# Altium PCB PCBV1.2.PcbDoc
Units mil, origin at the board's own origin, x right, y up, seen from the top; angles counter-clockwise.
Board outline 1600 x 1600 mil, 2 copper layers (Top Layer, Bottom Layer); 61 components, 58 nets, 233 pads, 60 vias.
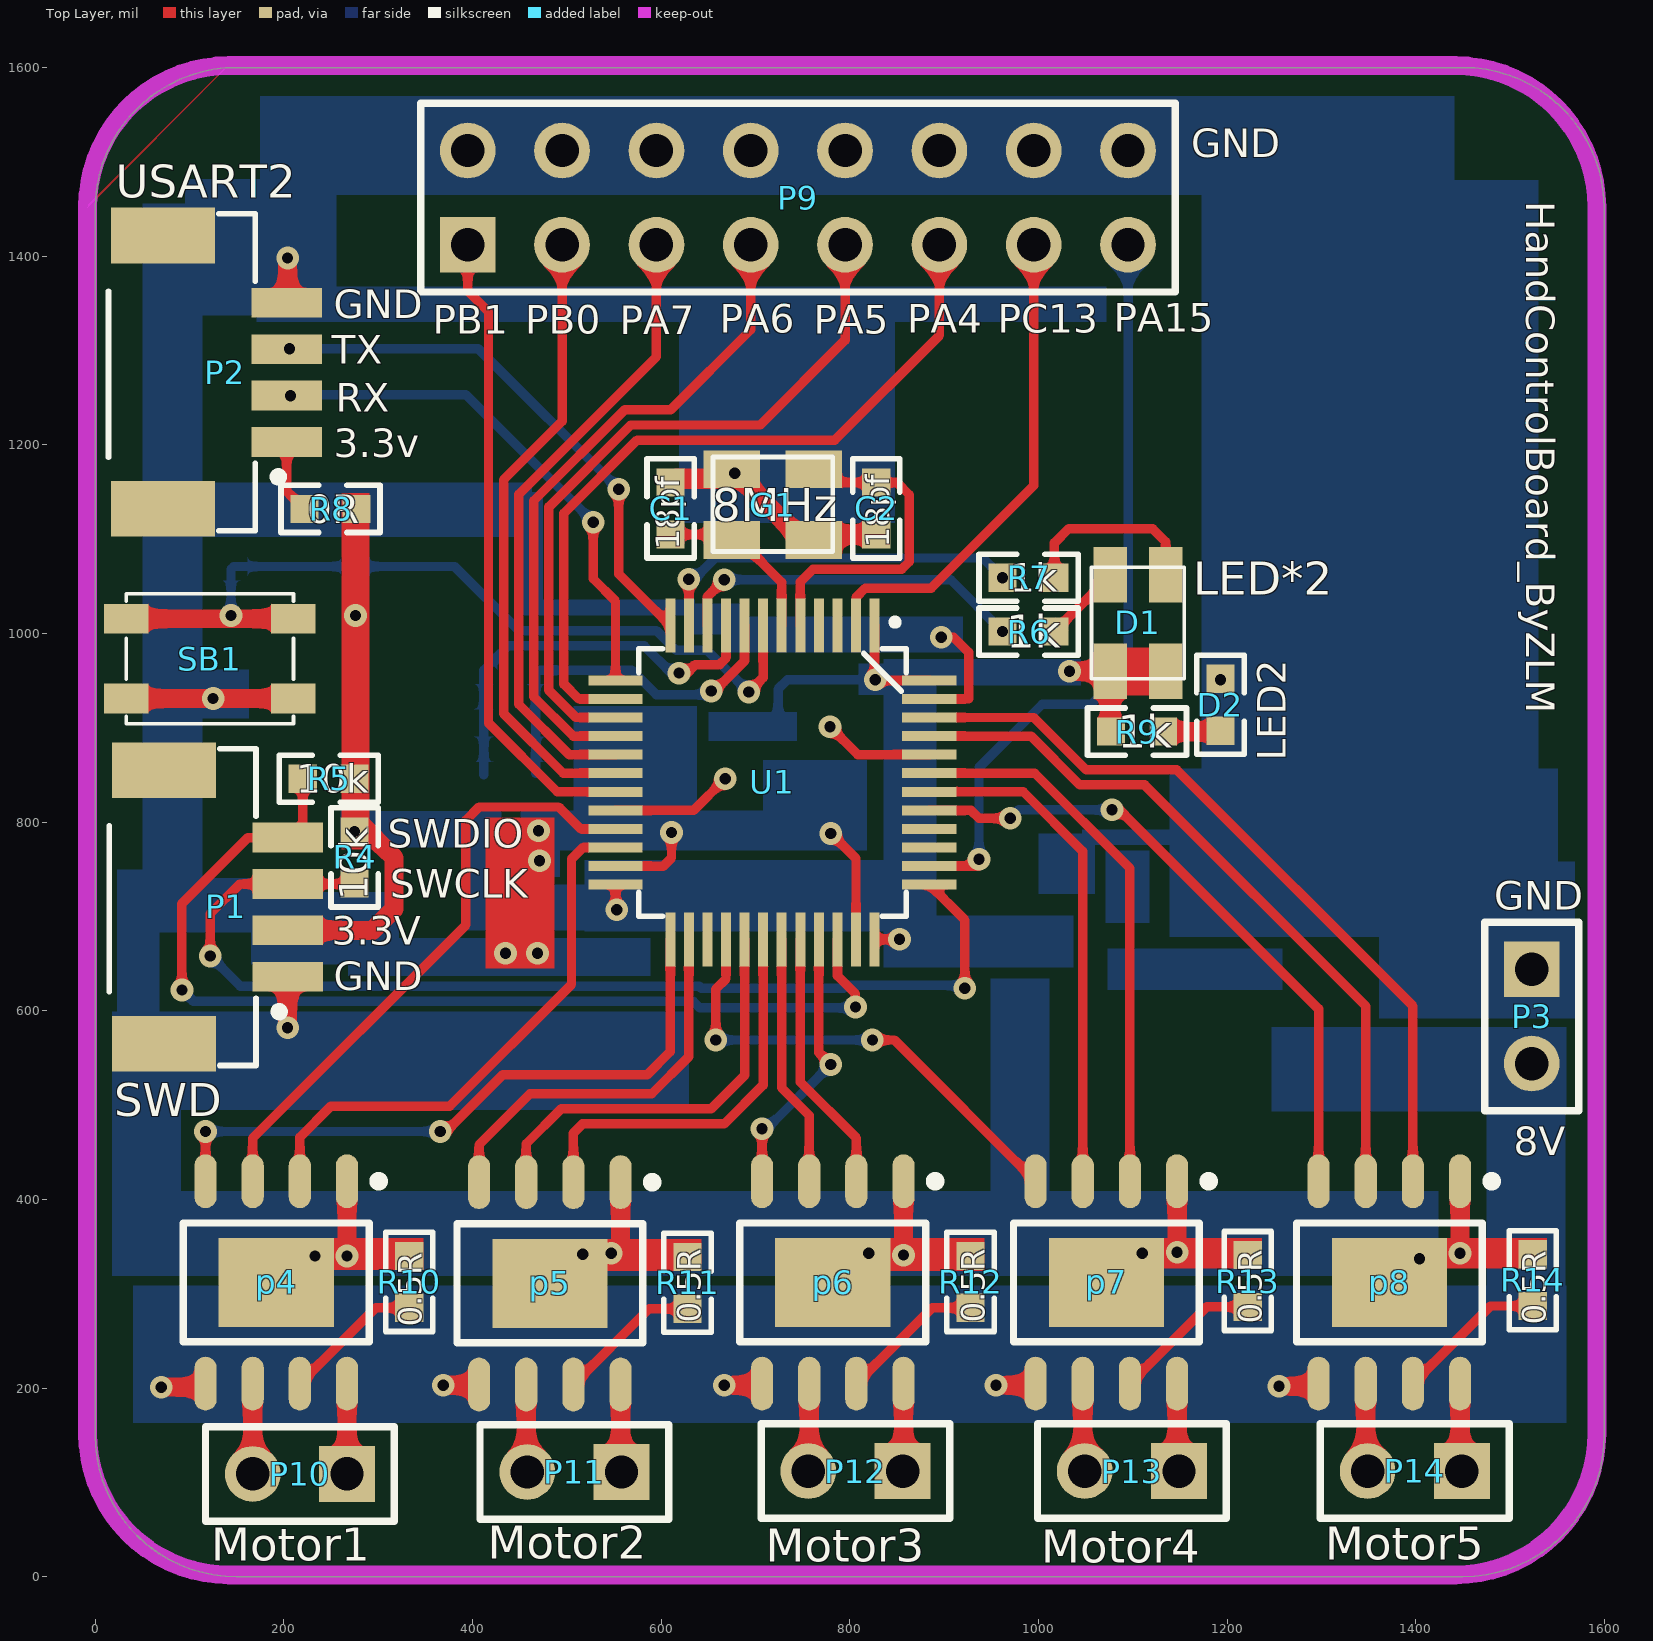
[diagram p0: Top Layer view]
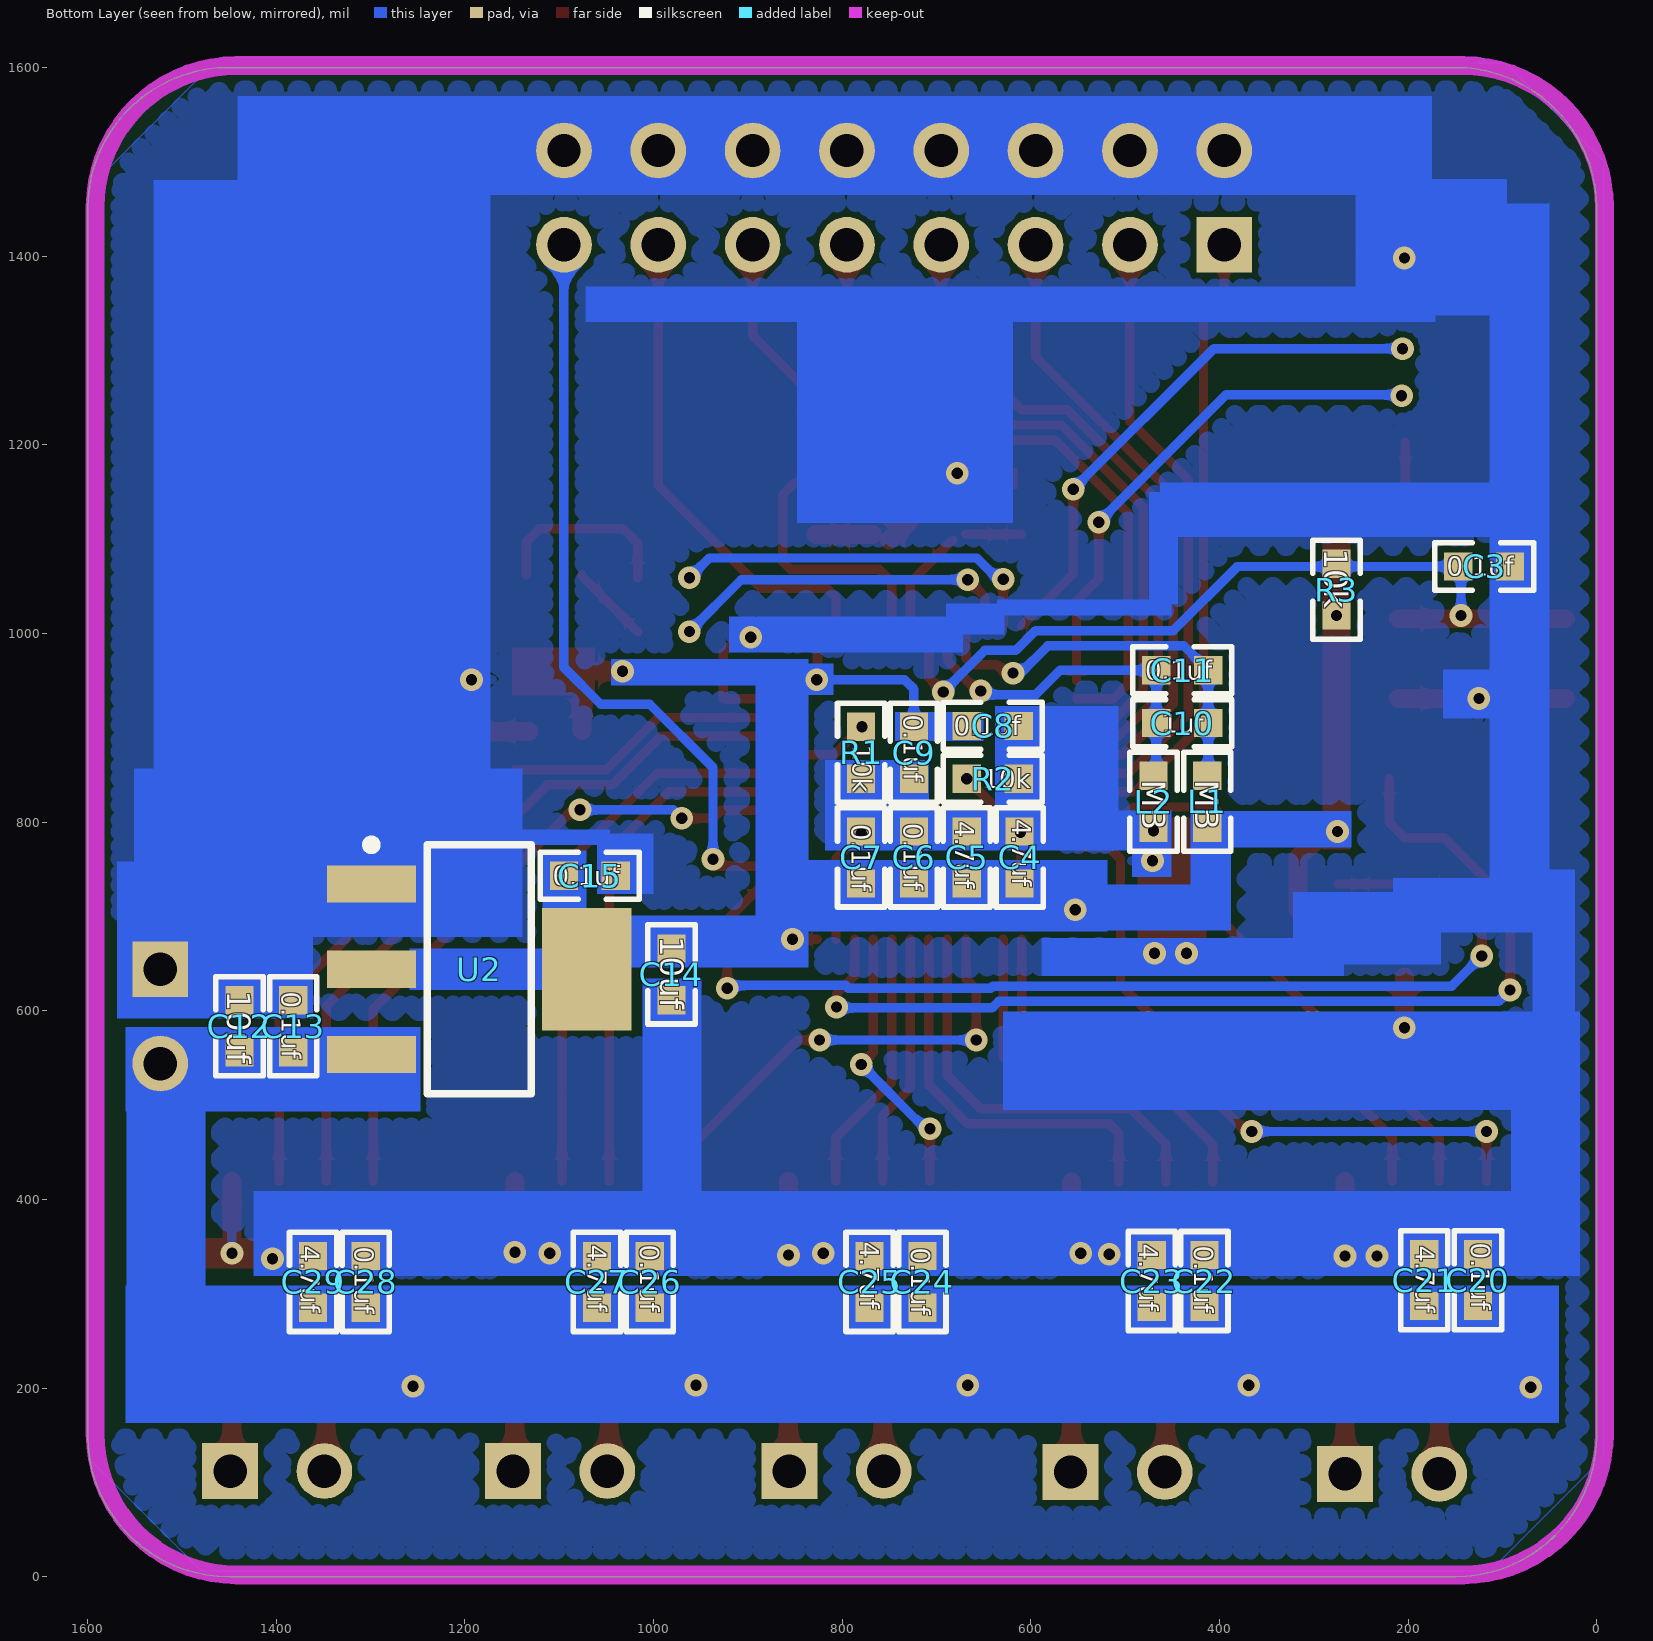
[diagram p1: Bottom Layer view, seen from below]

## Layer stack, top to bottom
Top Solder: solder mask 0.4, Solder Resist, Dk 3.5
Top Layer: signal copper 1.4
Dielectric 1: dielectric 12.6, FR-4, Dk 4.8
Bottom Layer: signal copper 1.4
Bottom Solder: solder mask 0.4, Solder Resist, Dk 3.5

## Board outline
150,0 cw(c150,150) 0,150 0,1450 cw(c150,1450) 150,1600 1450,1600 cw(c1450,1450) 1600,1450 1600,150 cw(c1450,150) 1450,0

## Design rules (kind name [scope] priority, off if disabled: settings)
Clearance [All] p1: gap=6
ComponentClearance [All] p1 off: gap=0 collisioncheckmode=3 verticalgap=10 showdistances=FALSE
MinimumSolderMaskSliver [All] p1: minsoldermaskwidth=0
PolygonConnect [All] p1: connectstyle=Relief reliefconductorwidth=10 reliefentries=4 polygonreliefangle="90 Angle" airgapwidth=10
RoomDefinition 原理图v1.2 [InComponentClass('原理图v1.2')] p1: confinementstyle=ConfineIn formatcopy=TRUE lockcomponents=FALSE outline -21,-6 1603,-6 1603,1616 -21,1616
RoutingVias [All] p1: holewidth=11.81 width=23.62 viastyle="Through Hole" minholewidth=11.81 minwidth=23.62 maxholewidth=157.48 maxwidth=157.48
SilkToBoardRegionClearance [All] p1 off:
SilkToSilkClearance [All] p1: silktosilkclearance=0
SilkToSolderMaskClearance [IsPad] p1: minsilkscreentomaskgap=0 clearancetoexposedcopper=TRUE
SolderMaskExpansion [All] p1: expansion=4
Width [All] p1: maxlimit=40 minlimit=6 preferedwidth=10
25 further rules are at their usual default settings.

## Components (designator, comment, footprint, x,y, rotation, side; value= is the part's Value field where it differs from the comment)
C1 "18pf" 0603 610,1105 r90 top
C2 "18pf" 0603 828,1160 r270 top
C3 "0.1uf" 0603 92,1071 r0 bottom
C4 "4.7uf" 0603 612,790 r270 bottom
C5 "4.7uf" 0603 668,790 r270 bottom
C6 "0.1uf" 0603 724,790 r270 bottom
C7 "0.1uf" 0603 780,790 r270 bottom
C8 "0.1uf" 0603 613,902 r0 bottom
C9 "0.1uf" 0603 724,846 r90 bottom
C10 "1uf" 0603 467,905 r180 bottom
C11 "0.1uf" 0603 467,961 r180 bottom
C12 "10uf" 0603 1439,611 r270 bottom
C13 "0.1uf" 0603 1382,611 r270 bottom
C14 "10uf" 0603 981,611 r90 bottom
C15 "0.1uf" 0603 1040,743 r0 bottom
C20 "0.1uf" 0603 126,342 r270 bottom
C21 "4.7uf" 0603 183,342 r270 bottom
C22 "0.1uf" 0603 416,341 r270 bottom
C23 "4.7uf" 0603 472,341 r270 bottom
C24 "0.1uf" 0603 715,340 r270 bottom
C25 "4.7uf" 0603 771,340 r270 bottom
C26 "0.1uf" 0603 1004,340 r270 bottom
C27 "4.7uf" 0603 1060,340 r270 bottom
C28 "0.1uf" 0603 1305,340 r270 bottom
C29 "4.7uf" 0603 1361,340 r270 bottom
D1 "LED*2" 1206LED*2 1106,1012 r0 top
D2 "LED2" 0603 1193,897 r90 top
G1 "8MHz" 3225OSC 714,1143 r0 top
L1 "MB" 0603 413,794 r90 bottom
L2 "MB" 0603 470,794 r90 bottom
P1 "SWD" GH1.25-4P 204,636 r180 top
P2 "USART2" GH1.25-4P 203,1203 r180 top
P3 "8V_Input" HDR1X2 1523,644 r270 top
p4 "DRV8872" SOP8-PowerPAD 192,312 r270 top
p5 "DRV8872" SOP8-PowerPAD 482,311 r270 top
p6 "DRV8872" SOP8-PowerPAD 782,312 r270 top
p7 "DRV8872" SOP8-PowerPAD 1072,312 r270 top
p8 "DRV8872" SOP8-PowerPAD 1372,312 r270 top
P9 "Header 8X2A" HDR2X8_CEN 395,1412 r0 top
P10 "Motor1" HDR1X2 267,109 r180 top
P11 "Motor2" HDR1X2 558,111 r180 top
P12 "Motor3" HDR1X2 856,112 r180 top
P13 "Motor4" HDR1X2 1149,112 r180 top
P14 "Motor5" HDR1X2 1449,112 r180 top
R1 "10k" 0603 780,901 r270 bottom
R2 "10k" 0603 613,846 r0 bottom
R3 "10k" 0603 276,1074 r270 bottom
R4 "10k" 0603 275,735 r90 top
R5 "10k" 0603 220,846 r0 top
R6 "1k" 0603 1017,1002 r180 top
R7 "1k" 0603 1017,1059 r180 top
R8 "0R" 0603 277,1132 r180 top
R9 "1k" 0603 1132,896 r180 top
R10 "0.5R" 0603 333,285 r90 top
R11 "0.5R" 0603 628,284 r90 top
R12 "0.5R" 0603 928,285 r90 top
R13 "0.5R" 0603 1222,286 r90 top
R14 "0.5R" 0603 1524,287 r90 top
SB1 "SW-4" SKRPADE010 33,931 r90 top
U1 "STM32F103" LQFP48 718,842 r270 top
U2 "REG1117-3.3" SOT223 1185,644 r180 bottom

## Footprints (in the part's own frame and the unit in brackets; to place one, negate y for a bottom-side part, rotate by r counter-clockwise, add the part's x,y. Pads: shape width x height; smd on the part's side, far side on the other; paste and mask are expansions set on the pad)
0603 [mil]
  rect 30x30 smd: 1(0,0) 2(55,0)
  silkscreen extent -25,-25 80,25
1206LED*2 [mil]
  rect 35.43x59.06 smd paste+0 mask+4: 1(-30.06,-52) 2(29,-52) 3(29,50.36) 4(-30.06,50.36)
  silkscreen extent -50,-60 49,58
3225OSC [mil]
  rect 60x40 smd: 1(-39,-44) 2(48,-44) 3(48,31) 4(-39,31)
  silkscreen extent -59,-56 68,44
GH1.25-4P [mm] "卧贴与立贴封装相同"
  rect 1.9x0.8 smd paste+0 mask+0.102: 1(0,0) 2(0,-1.25) 3(0,-2.5) 4(0,-3.75)
  rect 2.8x1.5 smd paste+0 mask+0.102: ""(3.324,1.799) ""(3.324,-5.559)
  silkscreen extent 0.12,-6.15 4.8,2.39
HDR1X2 [mm] "Connector; Header; 2 Position"
  rect 1.5x1.5 hole 0.9: 1(0,0)
  round 1.5 hole 0.9: 2(2.54,0)
  silkscreen extent -1.27,-1.27 3.81,1.27
HDR2X8_CEN [mm] "Connector; Header; 8x2 Position"
  rect 1.5x1.5 hole 0.9: 1(0,0)
  round 1.5 hole 0.9: 2(2.54,0) 3(5.08,0) 4(7.62,0) 5(10.16,0) 6(12.7,0) 7(15.24,0) 8(17.78,0) 9(0,2.54) 10(2.54,2.54) 11(5.08,2.54) 12(7.62,2.54) 13(10.16,2.54) 14(12.7,2.54) 15(15.24,2.54) 16(17.78,2.54)
  silkscreen extent -1.27,-1.27 19.05,3.81
LQFP48 [mm]
  rect 1.461x0.27 smd: 1(-4.225,2.75) 2(-4.225,2.25) 3(-4.225,1.75) 4(-4.225,1.25) 5(-4.225,0.75) 6(-4.225,0.25) 7(-4.225,-0.25) 8(-4.225,-0.75) 9(-4.225,-1.25) 10(-4.225,-1.75) 11(-4.225,-2.25) 12(-4.225,-2.75) 25(4.225,-2.75) 26(4.225,-2.25) 27(4.225,-1.75) 28(4.225,-1.25) 29(4.225,-0.75) 30(4.225,-0.25) 31(4.225,0.25) 32(4.225,0.75) 33(4.225,1.25) 34(4.225,1.75) 35(4.225,2.25) 36(4.225,2.75)
  rect 0.27x1.461 smd: 13(-2.75,-4.225) 14(-2.25,-4.225) 15(-1.75,-4.225) 16(-1.25,-4.225) 17(-0.75,-4.225) 18(-0.25,-4.225) 19(0.25,-4.225) 20(0.75,-4.225) 21(1.25,-4.225) 22(1.75,-4.225) 23(2.25,-4.225) 24(2.75,-4.225) 37(2.75,4.225) 38(2.25,4.225) 39(1.75,4.225) 40(1.25,4.225) 41(0.75,4.225) 42(0.25,4.225) 43(-0.25,4.225) 44(-0.75,4.225) 45(-1.25,4.225) 46(-1.75,4.225) 47(-2.25,4.225) 48(-2.75,4.225)
  silkscreen extent -4.37,-3.6 3.6,3.6
SKRPADE010 [mil]
  rect 31.5x47.24 smd paste+0 mask+4: 1(0,0) 2(0,-177.16) 3(84.64,-177.16) 4(84.64,0)
  silkscreen extent -27,-177 111,0
SOP8-PowerPAD [mm] "SOP, 8-Leads, Body 4.90x3.90mm, Pitch 1.27mm, Thermal Pad 3.10x2.40mm, IPC Medium Density"
  oval 1.45x0.6 smd: 1(-2.725,1.905) 2(-2.725,0.635) 3(-2.725,-0.635) 4(-2.725,-1.905) 5(2.725,-1.905) 6(2.725,-0.635) 7(2.725,0.635) 8(2.725,1.905)
  rect 2.4x3.1 smd: 9(0,0)
  silkscreen extent -2.85,-2.5 1.6,2.88
SOT223 [mm] "SOT223, 4-Leads, Body 6.5x3.5mm, Pitch 2.3mm, Lead Span 7mm, IPC Medium Density"
  rect 2.4x1 smd: 1(-2.9,2.3) 2(-2.9,0) 3(-2.9,-2.3)
  rect 2.4x3.3 smd: 4(2.9,0)
  silkscreen extent -3.03,-3.35 1.4,3.47

## Part data
C1 C2 C3 C4 C5 C6 C7 C8 C9 C10 C11 C12 C13 C14 C15 C20 C21 C22 C23 C24 C25 C26 C27 C28 C29: library part Cap, "Capacitor"
D1: "Typical INFRARED GaAs LED"
D2: "Typical RED, GREEN, YELLOW, AMBER GaAs LED"
G1: library part 3225OSC, "Crystal Oscillator"
L1 L2: library part INDUCTOR1
P1 P2: library part "Header 4", "Header, 4-Pin"
P3 P10 P11 P12 P13 P14: library part "Header 2", "Header, 2-Pin"
P9: "Header, 8-Pin, Dual row"
R1 R2 R3 R4 R5 R6 R7 R8 R9 R10 R11 R12 R13 R14: library part Res1, "Resistor"

## Via types
v1: diameter 24, hole 12, Top Layer to Bottom Layer, 60 vias

## Nets (pads, with @x,y where several pads share a name; then routed paths per layer and width w, separated by ;. In a path a pad name is that pad's centre, name@x,y a point inside that pad or via, vN(x,y) a via of type N, cw(c..) or ccw(c..) an arc to the next point about the centre after c; other vN are vias at no path point)
8V: C12.2 C13.2 C20.2 C21.2 C22.2 C23.2 C24.2 C25.2 C26.2 C27.2 C28.2 C29.2 P3.2 p4.5 p5.5 p6.5 p7.5 p8.5 U2.3 | length 198.4
  Top Layer w20: v1(70,201) p4.5@113.28,201 ; v1(369,203) p5.5@406.28,203 ; v1(667,203) p6.5@705.28,203 ; v1(955,203) p7.5@995.28,203 ; v1(1255,202) p8.5@1294.28,202
A3.3V: C10.2 C11.2 L1.2 U1.9 | length 426.2
  Top Layer w10: v1(619,958) 627,958 636,967 662,967 668.79,973.79 U1.9
  Bottom Layer w10: L1.2@412,850 C10.2 C11.2 438,987 450,987 ; 447.44,987 582,987 v1@611,958
AGND: C10.1 C11.1 L2.2 U1.8 | length 393.6
  Top Layer w10: v1(653,939) 656.63,939 688.47,970.85 U1.8
  Bottom Layer w10: L2.2@467,852 C10.1 C11.1 569,961 595,935 649,935 v1(653,939)
D3.3V: C4.2 C5.2 C6.2 C7.2 C8.2 C9.2 C14.2 C15.2 D1.1 D1.2 L1.1 P1.2 R3.2 R4.2 R5.2 R8.1 R9.2 U1.1 U1.24 U1.36 U1.48 U2.2 U2.4 | length 648.1
  Top Layer w10: v1@551.66,708.34 U1.24 ; U1.36 v1(852.66,675.66) ; v1@826.27,951.73 U1.1 ; v1@827.73,950.27 U1.48
  Top Layer w20: P1.2 294.21,685.21 317,708 317,762 289,790 v1(275,790) ; v1(1033,960) D1.1 R9.2@1075.94,897.06
  Bottom Layer w10: C9.2 724,941 734,951 v1(827,951)
  other v1: 553,707 276,1019
GND: C1.2 C2.2 C3.1 C4.1 C5.1 C6.1 C7.1 C8.1 C9.1 C12.1 C13.1 C14.1 C15.1 C20.1 C21.1 C22.1 C23.1 C24.1 C25.1 C26.1 C27.1 C28.1 C29.1 D2.2 G1.2 G1.4 L2.1 P1.1 P2.4 P3.1 p4.1 p4.9 p5.1 p5.9 p6.1 p6.9 p7.1 p7.9 p8.1 p8.9 P9.9 P9.10 P9.11 P9.12 P9.13 P9.14 P9.15 P9.16 R1.2 R2.1 R10.2 R11.2 R12.2 R13.2 R14.2 SB1.1 SB1.2 U1.23 U1.35 U1.47 U2.1 | length 1221.4
  Top Layer w10: U1.23 602.42,753.42 611,762 v1(611,789) ; v1(780,788) 806.58,761.42 U1.35 ; U1.47 926,930.58 926,980 910,996 v1(897,996)
  Top Layer w20: SB1.1 SB1.2 ; P2.4 204,1351.64 v1(204,1398) ; v1(204,582) P1.1 ; v1(267,340) p4.1 ; v1@557,340 p5.1 ; G1.4 G1.2@750,1099 ; G1.2@768,1105 C2.2 ; v1(857,341) p6.1 ; p7.9@1101,341 1147,341 p7.1 ; v1(1447,343) p8.1
  other v1: 1404,337 233,340 517,342 547,343 820,343 1110,343 1147,344 435,661 469,661 471,759 470,791 125,931 1193,951 678,1170
HDR_1: P9.1 U1.19 | length 680.9
  Top Layer w10: P9.1 395,1363 417,1341 417,905 489.84,832.16 U1.19
HDR_2: P9.2 U1.18 | length 673.2
  Top Layer w10: P9.2@499,1408 P9.2 495,1225 433,1163 433,915 496.16,851.84 U1.18
HDR_3: P9.3 U1.17 | length 672.3
  Top Layer w10: U1.17 502.47,871.53 449,925 449,1147.41 595,1293.41 P9.3
HDR_4: P9.4 U1.16 | length 706.8
  Top Layer w10: U1.16 506.79,891.21 465,933 465,1140.78 561.22,1237 610,1237 695,1322 P9.4
HDR_5: P9.5 U1.15 | length 765.3
  Top Layer w10: U1.15 509.73,910.9 481,939.63 481,1134.15 567.85,1221 705,1221 795,1311 P9.5
HDR_6: P9.6 U1.14 | length 814.5
  Top Layer w10: U1.14 512.67,930.58 497,946.25 497,1127.53 574.47,1205 784,1205 895,1316 P9.6
HDR_7: P9.7 U1.2 | length 522.7
  Top Layer w10: U1.2 806.58,1038.29 816.4,1048.1 836.14,1048.1 836.24,1048 886.17,1048 995,1156.83 P9.7
HDR_8: P9.8 U1.38 | length 799.7
  Top Layer w10: U1.38 v1@936.58,753.42
  Bottom Layer w10: v1(937,760.5) 937,855.5 937,858 1004,925 1056,925 1095,964 P9.8
LED_G: R6.2 U1.10 | length 373.9
  Top Layer w10: U1.10 649.1,1039.1 v1(667,1057)
  Bottom Layer w10: v1(667,1057) 907,1057 v1(962,1002)
LED_R: R7.2 U1.11 | length 394.2
  Top Layer w10: U1.11 v1(629.42,1057.42)
  Bottom Layer w10: v1@634.89,1057.42 657.47,1080 941,1080 v1(962,1059)
M1_IN1/TIM2_CH3: p4.3 U1.21 | length 650.4
  Top Layer w10: p4.3 167,465 393,691 393,802 407,816 491,816 492,815 492.56,815 514.77,792.79 U1.21
M1_IN2/TIM2_CH4: p4.2 U1.22 | length 586.5
  Top Layer w10: p4.2 217,466 250,499 376,499 505,628 505,761 517.1,773.1 U1.22
M2_IN1/TIM1_CH1: p5.3 U1.29 | length 446.4
  Top Layer w10: p5.3 457,459 494,496 653,496 688.47,531.47 U1.29
M2_IN2/TIM1_CH2: p5.2 U1.30 | length 428.8
  Top Layer w10: p5.2 507,470.37 516.63,480 667,480 708.16,521.16 U1.30
M3_IN1/TIM1_CH3: p6.3 U1.31 | length 268.5
  Top Layer w10: U1.31 727.84,518.16 757,489 p6.3
M3_IN2/TIM1_CH4: p6.2 U1.32 | length 281
  Top Layer w10: U1.32 747.53,524.47 807,465 p6.2
M4_IN1/TIM4_CH1: p7.3 U1.42 | length 538.5
  Top Layer w10: U1.42 983.84,832.16 1047,769 p7.3
M4_IN2/TIM4_CH2: p7.2 U1.43 | length 586.1
  Top Layer w10: U1.43 996.16,851.84 1097,751 p7.2
M5_IN1/TIM4_CH3: p8.3 U1.45 | length 766.9
  Top Layer w10: U1.45 992.16,891.21 1043.87,839.5 1112.5,839.5 1347,605 p8.3
M5_IN2/TIM4_CH4: p8.2 U1.46 | length 825.1
  Top Layer w10: U1.46 995.1,910.9 1050.5,855.5 1146.5,855.5 1397,605 p8.2
MOTOR1_FAULT: p4.4 U1.25 | length 699.5
  Top Layer w10: p4.4 v1(117,472) ; v1(366,472) 372,472 432,532 585,532 609.73,556.73 U1.25
  Bottom Layer w10: v1(117,472) v1(366,472)
MOTOR2_FAULT: p5.4 U1.26 | length 425.1
  Top Layer w10: p5.4 407,458 461,512 590,512 629.42,551.42 U1.26
MOTOR3_FAULT: p6.4 U1.33 | length 294.8
  Top Layer w10: p6.4 v1(707,475) ; U1.33 767.21,555.79 v1(780,543)
  Bottom Layer w10: v1(707,475) 712,475 v1(780,543)
MOTOR4_FAULT: p7.4 U1.28 | length 515
  Top Layer w10: v1(658,569) 658,623 668.79,633.79 U1.28 ; v1(824,569) 847.28,569 p7.4
  Bottom Layer w10: v1(658,569) v1(824,569) v1@822,571
MOTOR5_FAULT: p8.4 U1.41 | length 690
  Top Layer w10: U1.41 928.53,812.47 937,804 v1(970,804) ; v1(1078,813) 1086,813 1297,602 p8.4
  Bottom Layer w10: v1(970,804) 979,813 v1(1078,813)
NetC1_1: C1.1 G1.1 U1.6 | length 168.2
  Top Layer w10: C1.1 G1.1@669,1105 ; G1.1@683,1099 727.84,1054.16 U1.6
NetC2_1: C2.1 G1.3 U1.5 | length 333.9
  Top Layer w10: U1.5 747.53,1054.53 761,1068 855,1068 863,1076 863,1147 850,1160 C2.1 G1.3@776,1160
NetC3_2: C3.2 R3.1 SB1.3 SB1.4 U1.7 | length 903.9
  Top Layer w10: v1(693,938) 708.16,953.16 U1.7
  Top Layer w20: SB1.4 SB1.3
  Bottom Layer w10: v1(144,1019) C3.2@144,1068 ; C3.2 381,1071 449,1003 595,1003 616,982 649,982 v1(693,938)
NetD1_3: D1.3 R7.1 | length 201.7
  Top Layer w10: R7.1 1017,1096 1032,1111 1121,1111 1135,1097 D1.3
NetD1_4: D1.4 R6.1 | length 84.8
  Top Layer w10: R6.1 1075.94,1060.94 D1.4
NetD2_1: D2.1 R9.1 | length 60
  Top Layer w20: R9.1 D2.1@1192,896
NetP2_1: P2.1 R8.2 | length 78.9
  Top Layer w10: P2.1 203,1151 R8.2
Netp4_6: p4.6 P10.2 | length 95.7
  Top Layer w20: P10.2 p4.6
Netp4_7: p4.7 R10.1 | length 149.3
  Top Layer w10: p4.7 297.28,285 R10.1
Netp4_8: p4.8 P10.1 | length 95.7
  Top Layer w20: P10.1 p4.8
Netp5_6: p5.6 P11.2 | length 91.7
  Top Layer w20: P11.2@457,112 p5.6
Netp5_7: p5.7 R11.1 | length 154.3
  Top Layer w10: p5.7 587.28,284 R11.1
Netp5_8: p5.8 P11.1 | length 91.7
  Top Layer w20: P11.1@557,112 p5.8
Netp6_6: p6.6 P12.2 | length 91.7
  Top Layer w20: P12.2@757,113 p6.6
Netp6_7: p6.7 R12.1 | length 154.3
  Top Layer w10: p6.7 887.28,285 R12.1
Netp6_8: p6.8 P12.1 | length 91.7
  Top Layer w20: P12.1@857,113 p6.8
Netp7_6: p7.6 P13.2 | length 90.7
  Top Layer w20: P13.2@1047,114 p7.6
Netp7_7: p7.7 R13.1 | length 158.7
  Top Layer w10: p7.7 1178.28,286 R13.1
Netp7_8: p7.8 P13.1 | length 90.7
  Top Layer w20: P13.1@1147,114 p7.8
Netp8_6: p8.6 P14.2 | length 90.7
  Top Layer w20: P14.2@1347,114 p8.6
Netp8_7: p8.7 R14.1 | length 161.1
  Top Layer w10: p8.7 1479.28,287 R14.1
Netp8_8: p8.8 P14.1 | length 90.7
  Top Layer w20: P14.1@1447,114 p8.8
NetR1_1: R1.1 U1.44 | length 117.5
  Top Layer w10: v1(779,901) 808.47,871.53 U1.44
NetR2_2: R2.2 U1.20 | length 130.2
  Top Layer w10: U1.20 634.47,812.47 v1(668,846)
SWCLK: P1.3 R4.1 U1.37 | length 1152.3
  Top Layer w10: v1(122,658) 122,703 153.42,734.42 P1.3 R4.1@274.42,734.42 ; U1.37 922,696.07 v1(922,624)
  Bottom Layer w10: v1(122,658) 154,626 640.6,626 642.6,624 793.47,624 796.47,627 919,627 v1(922,624)
SWDIO: P1.4 R5.1 U1.34 | length 1103.1
  Top Layer w10: v1(92,622) 92,713.63 162.01,783.64 P1.4 220,799.64 R5.1 ; U1.34 786.9,637.1 806,618 v1(806,604)
  Bottom Layer w10: v1(92,622) 104,610 633.97,610 640.97,603 v1@806,603
USART2_RX: P2.2 U1.13 | length 553.7
  Top Layer w10: P2.2 P2.2@203.21,1252 ; v1(528,1118) 528,1058 551.66,1034.34 U1.13
  Bottom Layer w10: v1@208,1253 393,1253 v1(528,1118)
  other v1: 207,1252
USART2_TX: P2.3 U1.12 | length 578.1
  Top Layer w10: v1(555,1153) 555,1063.07 U1.12
  Bottom Layer w10: v1(206,1302) 406,1302 v1(555,1153)
pads on no net: P1. P2. U1.3 U1.4 U1.27 U1.39 U1.40

## Polygon pours and split planes (outlines as drawn)
no net on Bottom Layer "Bottom Layer-No Net" (solid, remove dead copper, pour order 8): 126,1605 97,1605 -10,1498 -7,1495 -7,127 -7,126.13 114.98,4.14 116.84,6 1461,6 1479,6 1589,116 1598.61,125.61 1598.61,1473.54 1597.46,1473.54 1466,1605 1460,1611 127,1611 123,1611 118,1606
GND on Bottom Layer "Bottom Layer-No Net" (hatched 45Degree grid 20 track 20, remove dead copper, pour order 5): 130,1603 -12,1461 -12,1460 -12,150 -8,146 126.46,11.54 126.46,1.39 1460.84,1.39 1461.77,0.46 1592,130.69 1592,134 1592,1465 1593,1466 1458.54,1600.46 1450,1600.46 1380.54,1600.46 1377,1604
GND on Top Layer "Bottom Layer-No Net" (hatched 45Degree grid 20 track 20, remove dead copper, pour order 11): 138.23,1599.54 -8,1453.31 -8,1452

## Keep-outs
Keep-Out Layer:
  lines w20: -8,152 ccw(c142,152) 142,2 1442,2 ccw(c1442,152) 1592,152 1592,1452 ccw(c1442,1452) 1442,1602 142,1602 ccw(c142,1452) -8,1452 -8,152

## Other copper
Top Layer:
  rectangle net GND: 414,645 487,805
  rectangle net GND: 414,645 485,677
  rectangle net GND: 1394,327 1539,359
  rectangle net GND: 614,1153 674,1175
  rectangle net GND: 1416,333 1456,359
  rectangle net GND: 1114,327 1237,359
  rectangle net GND: 826,324 943,359
  rectangle net GND: 522,324 643,358
  rectangle net GND: 238,325 348,359
  rectangle net D3.3V: 261,771 291,1149
  rectangle net D3.3V: 1062,934 1150,985
Bottom Layer:
  rectangle net GND: 45,683 216,741
  rectangle net GND: 165,649 322,726
  rectangle net GND: 268,637 589,677
  rectangle net GND: 451,742 493,812.47
  rectangle net D3.3V: 388,685 581,734
  rectangle net GND: 86,1102 463,1160
  rectangle net GND: 444,1031 475,1150
  rectangle net GND: 451,1019 636,1036
  rectangle net GND: 628,999 690,1032
  rectangle net GND: 672,980 920,1018
  rectangle net GND: 619,1117 848,1346
  rectangle net GND: 171,1330 1072,1368
  rectangle net GND: 1046,776 1218,792
  rectangle net GND: 1000,724 1060,788
  rectangle net GND: 949,394 1012,634
  rectangle net GND: 23,566 68,750
  rectangle net GND: 87,910 163,962
  rectangle net GND: 50,704 114,1456
  rectangle net GND: 95,1337 256,1482
  rectangle net GND: 1173,724 1530,1481
  rectangle net GND: 175,1465 1441,1570
  rectangle net GND: 82,495 629.42,599
  rectangle net GND: 18,389 91,599
  rectangle net GND: 1139,678 1551,857
  rectangle net GND: 1361,592 1569,758
  rectangle net GND: 18,319 1424,409
  rectangle net GND: 507,771 638,923
  rectangle net GND: 708,770 818,866
  rectangle net GND: 451,770 812,812.47
  rectangle net 8V: 1247,493 1560,583
  rectangle net 8V: 40,163 1560,309
  rectangle net 8V: 1475,305 1559,568
  rectangle net D3.3V: 1073,622 1259,666
  rectangle net D3.3V: 519,684 888,760
  rectangle net D3.3V: 875,646 1037,701
  rectangle net D3.3V: 1071,693 1118,770
  rectangle net D3.3V: 836,646 892,969
  rectangle net D3.3V: 650,886 744,917
  rectangle net D3.3V: 809,935 887,968
  rectangle net D3.3V: 260,773 431,812
  rectangle net D3.3V: 388,685 431,808
  rectangle net D3.3V: 836,945 1045,973

## Silkscreen, mask and mechanical layers (free items; w line width, h text height)
Top Overlay:
  text "GND" at 1162,1505 h30
  text "HandControlBoard_ByZLM" at 1517,1458 h30 r270
  text "GND" at 253,1334 h30
  text "PA15" at 1080,1320 h30
  text "PA6" at 662,1319 h30
  text "PA4" at 861,1319 h30
  text "PC13" at 957,1319 h30
  text "PB1" at 358,1318 h30
  text "PB0" at 456,1318 h30
  text "PA5" at 762,1318 h30
  text "PA7" at 556,1317 h30
  text "TX" at 251,1286 h30
  text "RX" at 255,1235 h30
  text "3.3v" at 253,1187 h30
  text "SWDIO" at 310,773 h30
  text "SWCLK" at 313,720 h30
  text "GND" at 1483,707 h30
  text "3.3V" at 251,670 h30
  text "GND" at 253,622 h30
  text "8V" at 1504,447 h30